# Altium PCB SuperGameBro_RevA1.PcbDoc (part 2 of 2)
Units mil, origin at the board's own origin, x right, y up, seen from the top; angles counter-clockwise.
Board outline 6943 x 4294 mil, 4 copper layers (Top Layer, GND, 3V3P, Bottom Layer), stack 33.234 mil thick; 150 components, 156 nets, 716 pads, 351 vias.
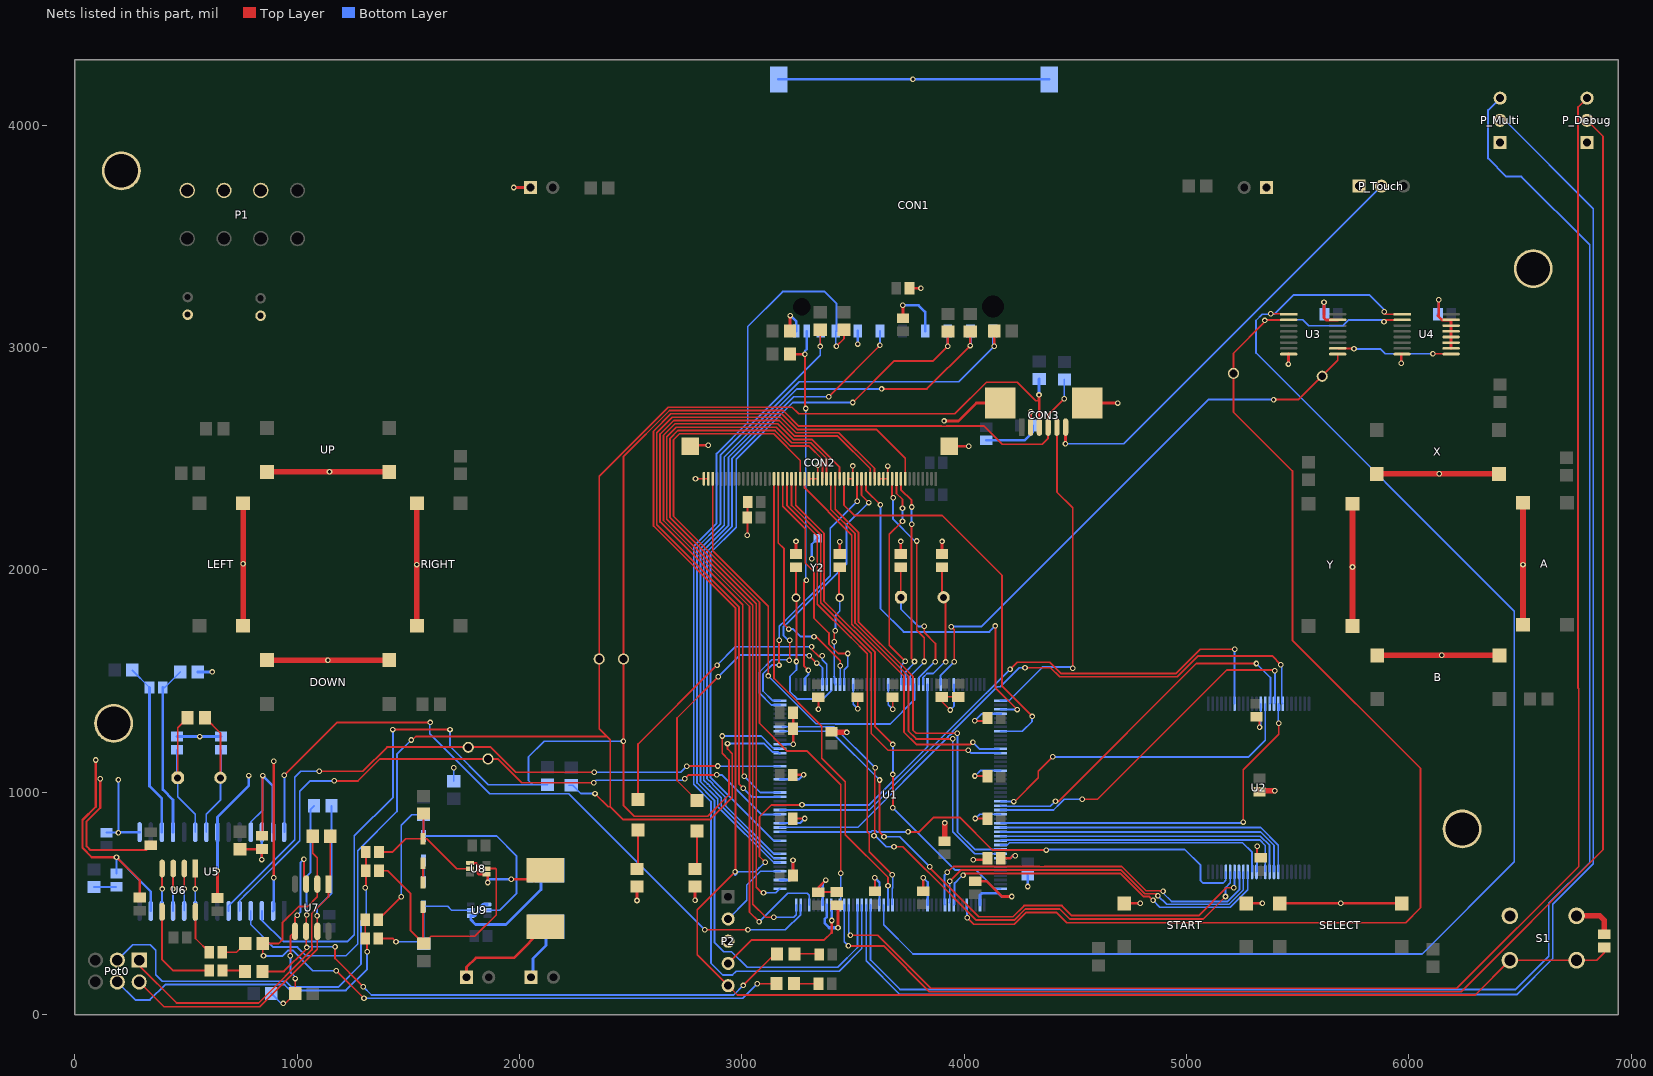
[diagram p4: the nets of this part, all layers, seen from the top]

## Via types
v1: diameter 25, hole 15, Top Layer to Bottom Layer, 351 vias

## Nets (pads, with @x,y where several pads share a name; then routed paths per layer and width w, separated by ;. In a path a pad name is that pad's centre, name@x,y a point inside that pad or via, vN(x,y) a via of type N, cw(c..) or ccw(c..) an arc to the next point about the centre after c; other vN are vias at no path point) (continued)
FMC_D4: U1.68 U2.14 | length 1484.4
  Top Layer w8: v1(4223,958) 4227,958 4334,1065 4334,1094 v1(4399,1159)
  Bottom Layer w8: U1.68@4165.7,958 v1(4223,958) ; v1(4399,1159) 5280,1159 5354.53,1233.53 U2.14@5354.53,1397.95
FMC_D5: U1.69 U2.15 | length 1624.4
  Top Layer w8: v1(4411.41,959.41) 4425.41,959.41 5045,1579 v1(5315,1579)
  Bottom Layer w8: U1.69@4164.29,939.73 4167.52,936.5 4388.5,936.5 v1(4411.41,959.41) ; v1(5315,1579) 5378,1516 5378,1401.74 U2.15@5376,1399.74
FMC_D6: U1.70 U2.16 | length 1644.7
  Top Layer w8: v1(4531,968) 4600,968 5182,1550 5394,1550 v1(5398,1546)
  Bottom Layer w8: U1.70@4164.29,920.04 4402.45,920.04 4432.91,950.5 4432.91,950.91 4450,968 v1(4531,968) ; U2.16@5395,1399.06 5398,1402.06 v1(5398,1546)
FMC_D7: U1.73 U2.17 | length 1720.7
  Top Layer w8: v1(5256,866) 5256,1101 5415,1260 v1(5415,1310)
  Bottom Layer w8: U1.73@4165.3,862 5252,862 v1(5256,866) ; v1(5415,1310) 5413.58,1311.42 U2.17@5413.58,1397.95 5418.36,1393.17 U2.17@5418.36,1370
FMC_D8: U1.74 U2.32 | length 1401.8
  Bottom Layer w8: U1.74@4164.29,841.3 5333.7,841.3 5413.58,761.42 U2.32@5413.58,642.05
FMC_D9: U1.75 U2.33 | length 1373.7
  Bottom Layer w8: U1.75@4164.29,821.62 5333.38,821.62 5393.9,761.1 U2.33@5393.9,642.05
FMC_D10: U1.76 U2.34 | length 1345.7
  Bottom Layer w8: U1.76@4164.29,801.93 5333.07,801.93 5374.21,760.79 U2.34@5374.21,642.05
FMC_D11: U1.77 U2.35 | length 1320.4
  Bottom Layer w8: U1.77@4164.29,782.24 4167.54,785.5 5329.5,785.5 5354.53,760.47 U2.35@5354.53,642.05
FMC_D12: U1.78 U2.38 | length 1240.6
  Bottom Layer w8: U1.78@4164.29,762.56 4194.56,762.56 4204.5,772.5 5252.5,772.5 5295.47,729.53 U2.38@5295.47,642.05
FMC_D13: U1.96 U2.39 | length 1613.3
  Top Layer w8: v1(3995.5,626.5) 4004,635 4703.23,635 4807.73,530.5 4833.5,530.5 v1(4850,514)
  Bottom Layer w8: U1.96@3953.66,492.88 3957.5,496.71 3957.5,591.5 3987,621 3988,620 3994.5,626.5 v1(3995.5,626.5) ; v1(4850,514) 4881,483 5197.17,483 5275.79,561.61 U2.39@5275.79,642.05
FMC_D14: U1.97 U2.40 | length 1611.3
  Top Layer w8: v1(3936,600) 3986,650 4706.62,650 4813.12,543.5 4863.5,543.5 v1(4872,535)
  Bottom Layer w8: U1.97@3934,502.46 3936,504.46 v1(3936,600) ; v1(4872,535) 4911,496 5191.79,496 5256.1,560.31 U2.40@5256.1,642.05
FMC_D15: U1.98 U2.41 | length 1651.3
  Top Layer w8: v1(3925,640) 3951,666 4340.59,666 4342.09,664.5 4359.91,664.5 4361.41,666 4709,666 4818.5,556.5 4880.91,556.5 4882.41,555 v1(4895,555)
  Bottom Layer w8: U1.98@3915,493.59 3912.5,496.09 3912.5,627.5 v1(3925,640) ; v1(4895,555) 4895,547 4933,509 5186.41,509 5238.5,561.09 5238.5,639.96 U2.41@5236.42,642.05
FMC_NBL0: U1.169 U2.42 | length 2691.4
  Top Layer w8: v1(3620,1055) 3620,820 v1(3640,800) ; v1(3845,665) 3845,660.59 4065.59,440 4220,440 4270,490 4440,490 4485,445 5055,445 5180,570 v1(5213,570)
  Bottom Layer w8: U1.169@3172.17,1274.37 3400.63,1274.37 v1(3620,1055) ; v1(3640,800) 3710,800 v1(3845,665) ; v1(5213,570) 5216.73,573.73 U2.42@5216.73,642.05
FMC_NBL1: U1.170 U2.43 | length 2760.5
  Top Layer w8: v1(3595,805) 3597,805 3602,800 3598.5,796.5 3598.5,1108.5 v1(3600,1110) ; v1(3685,755) 3725,755 3823.5,656.5 3823.5,656.09 3836.09,643.5 3836.5,643.5 4055,425 4225,425 4275,475 4430,475 4475,430 5075,430 v1(5176,531)
  Bottom Layer w8: U1.170@3183.83,1295 3415,1295 v1(3600,1110) ; v1(3595,805) 3600,805 3650,755 v1(3685,755) ; v1(5176,531) 5176,571 5197.05,592.05 U2.43@5197.05,642.05
GND: A.0 B.0 C1.1 C2.1 C3.1 C4.1 C5.1 C6.1 C7.1 C8.1 C9.1 C10.1 C11.1 C12.1 C13.2 C14.2 C15.2 C16.1 C17.1 C18.1 C19.1 C20.1 C21.1 C22.1 C23.1 C24.1 C25.1 C26.1 C27.1 C28.1 C29.1 C30.1 C31.1 C32.1 C33.2 C34.1 C35.1 C36.1 C38.1 C39.1 C41.1 C42.1 C58.1 C62.1 C63.1 C64.1 C65.1 C80.1 CON1.3 CON1.6 CON2.0 CON2.A12 CON2.A13 CON2.A14 CON2.A20 CON2.A21 CON2.A28 CON2.A29 CON2.A30 CON2.A53 CON2.A54 CON3.0 CON3.2 CP1.1 CP2.1 DOWN.0 LEFT.0 LEFT_SHOULDER.1 P1.2 P1.4 P1.6 P2.3 P_Debug.1 P_Multi.1 P_Touch.1 pad.0@210,3795 pad.1@6240,835 pad.2@6560,3355 pad.3@175,1310 R28.2 R_A0.2 R_LED0.2 R_LED1.2 RIGHT.0 RIGHT_SHOULDER.1 S1.1 SELECT.0 START.0 U1.14 U1.22 U1.37 U1.48 U1.61 U1.71 U1.90 U1.102 U1.113 U1.126 U1.135 U1.148 U1.158 U1.166 U2.13 U2.37 U3.8 U3.15 U4.8 U4.10 U4.11 U4.12 U4.13 U4.14 U4.15 U5.2 U5.13 U5.15 U5.22 U5.25 U5.27 UP.0 X.0 Y2.3 Y.0 | length 17760.3
  Top Layer w8: C33.2@842,803.53 845,806.53 v1(845,1075) ; v1(2792,2410) CON2.A54@2830,2410 CON2.A53@2849.69,2410 ; v1(3025.47,2155.53) C62.1@3025.47,2236 ; C62.1@3026.47,2223 C63.1@3026.47,2291 ; CON2.A30@3302.44,2410 CON2.A29@3322.13,2410 CON2.A28@3341.81,2410 v1(3341.81,2469.81) ; v1(3345,1373) C13.2@3345,1428.47 ; CON2.A21@3479.61,2410 CON2.A20@3499.29,2410 v1(3499.29,2467.71) ; v1(3522,1376) C24.1@3522,1427.47 ; CON2.A14@3617.4,2410 CON2.A13@3637.09,2410 CON2.A12@3656.77,2410 v1(3656.77,2467.23) ; v1(3679,1373) C23.1@3679,1427.47 ; v1(3938,1370) 3901,1407 3901,1429.47 C21.1@3975,1429.47 ; v1(4048,1321) 4092.47,1321 C20.1@4105.47,1334 ; v1(4049,1073) C19.1@4106.47,1073 ; v1(4051,882) C18.1@4106.47,882 ; C29.1@5315,1339.47 5329,1325.47 v1(5329,1292) ; v1(5318,757) 5318,727.21 5315.16,724.37 C58.1@5335,704.53
  Top Layer w10: v1(95,1145) 95,935 35,875 35,750 77,708 v1(188,708) 292,604 C35.1@292,526.53 ; v1(115,1060) 115,930.46 53.5,868.96 53.5,756.85 70.35,740 320.53,740 C36.1@342,761.47 ; C7.1@3230.53,882 v1(3283,882) ; C6.1@3230.53,1079 v1(3278,1079) ; v1(3231.53,1215.53) C5.1@3231.53,1358 ; v1(3378,605) 3345,572 3345,551.53 C15.2@3427,551.53 ; C10.1@3599,556.53 v1(3599,615) ; C11.1@3816,556.53 v1(3816,616)
  Top Layer w12: C38.1@642,524.53 v1(642,646) ; v1(895,616) v1(895,1140) ; v1(1974,3720) LEFT_SHOULDER.1@2050,3720 ; v1(2529,513) R_LED1.2@2529,575.63 ; CON2.0@2768.98,2555.67 2773.31,2560 v1(2850,2560) ; v1(2790,514) R_LED0.2@2790,575.63 ; C8.1@3230.53,625 v1(3230.53,694.53) ; C3.1@3244,2071.53 v1(3244,2128) ; C4.1@3441,2071.53 v1(3441,2126) ; C1.1@3715,2071.53 v1(3715,2128) ; C27.1@3725,3132.53 v1(3725,3190) ; C28.1@3754.53,3267 v1(3806,3267) ; C2.1@3901,2071.53 v1(3901,2128) ; v1(3910,2670) 3975,2670 4055.55,2750.55 CON3.0@4163.54,2750.55 ; CON2.0@3934.33,2555.67 v1(4020.67,2555.67) ; v1(4042,696) 4098.47,696 C14.2@4105.47,703 ; C12.1@4050,599.53 4102.47,599.53 4171,531 v1(4215,531) ; C20.1@4104.88,1334.59 C20.1@4104.88,1339.12 ; CON3.2@4299.37,2642.28 v1(4299.37,2711.63) ; CON3.0@4553.31,2750.55 v1(4690.55,2750.55) ; START.0@4720,500 v1(4793,500) ; START.0@5253.21,484 START.0@5269.21,500 v1(5342,500) ; SELECT.0@5420,500 v1(5695,500) SELECT.0@5969.21,500 ; v1(5459,2926) 5459,2969.86 U3.8@5460,2970.87 ; v1(5619,3204) 5619,3134 5628.59,3124.41 U3.15@5680.47,3124.41 ; v1(5967,2929) 5967,2967.86 U4.8@5970,2970.87 ; v1(6135,3215) 6135,3146 6131.47,3142.47 6149.54,3124.41 U4.15@6190.47,3124.41 U4.14@6190.47,3098.82 U4.13@6190.47,3073.23 U4.12@6190.47,3047.64 U4.11@6190.47,3022.05 U4.10@6190.47,2996.46
  Top Layer w25: LEFT.0@757,1749.79 v1(757,2027) LEFT.0@757,2299 ; DOWN.0@864.79,1594 v1(1139,1594) DOWN.0@1414,1594 ; UP.0@864.79,2441 v1(1146,2441) UP.0@1414,2441 ; RIGHT.0@1539,1749.79 v1(1539,2024) RIGHT.0@1539,2299 ; C16.1@3405,1273.53 3409.53,1269 v1(3473,1269) ; C17.1@3913,780.53 v1(3913,862) ; C30.1@5329,1002.47 5331,1000.47 5336.53,1006 v1(5397,1006) ; Y.0@5747,1747.79 v1(5747,2013) Y.0@5747,2297 ; X.0@5856.79,2432 v1(6138,2432) X.0@6406,2432 ; B.0@5859,1616 v1(6149,1616) B.0@6408.21,1616 ; A.0@6514,1753 v1(6514,2024) A.0@6514,2302.21 ; S1.1@6754.75,444.13 6859.39,444.13 6880,423.53 C26.1@6880,360.53
  Bottom Layer w8: 792,866 845,919 v1(845,1075) ; R_A0.2@1705,1049.37 v1(1705,1110) ; U1.14@3501.91,1486 3501.91,1396.09 v1(3522,1376) ; U1.22@3659.38,1486 3659.38,1392.62 v1(3679,1373) ; v1(3938,1370) 3954.66,1386.66 U1.37@3954.66,1486 ; v1(4048,1321) 4080.11,1353.11 4125.89,1353.11 ; v1(4049,1073) 4074.2,1098.2 U1.61@4165.29,1098.2 ; v1(4051,882) 4070.35,901.35 U1.71@4165.29,901.35 ; U2.37@5315.16,642.05 5318,644.89 v1(5318,757) ; v1(5329,1292) 5334.84,1297.84 U2.13@5334.84,1397.95
  Bottom Layer w10: C41.1@143,818.53 v1(196.53,818.53) v1(196.53,1056.53) ; C42.1@188,634.53 v1(188,708) 342,554 U5.13@342,466 ; v1@198.33,820.33 U5.15@292,820.33 ; U1.148@3173.17,861.99 3262.99,861.99 v1(3283,882) ; U1.158@3173.17,1058.84 3257.84,1058.84 v1(3278,1079) ; U1.166@3173.95,1215.53 v1(3231.53,1215.53) ; v1(3315,2050) 3315,2115.14 Y2.3@3342.57,2142.72 ; U1.126@3364.11,493.88 3364.11,588.89 3378,602.78 v1(3378,605) ; v1(3599,615) 3620.02,593.98 U1.113@3620.02,493.88 ; v1(3816,616) 3836.55,595.45 U1.102@3836.55,493.88
  Bottom Layer w12: C34.1@460,1250.53 v1(562.53,1250.53) C39.1@658,1250.53 ; R28.2@553.37,1541 v1(618,1541) ; v1(642,646) U5.22@642,820.33 642,889 783,1030 v1(783,1075) ; v1(845,1075) 892,1028 U5.27@892,820.33 ; U5.2@892,466 895,469 v1(895,616) ; CON1.3@3165.48,4206.16 v1(3770.16,4206.16) CON1.6@4383.59,4206.16 ; U1.135@3172.17,605.08 3217.08,605.08 3230,618 3230,694 v1(3230.53,694.53) ; v1(3522.17,3015.83) CON1.6@3522.17,3074.27 ; v1(3725,3190) 3795,3190 3824.93,3160.07 CON1.3@3824.93,3074.27 ; U1.90@4071.77,492.88 4071.77,536.77 4080,545 4155,545 4169,531 v1(4215,531) ; C65.1@4100,2582.47 4271.47,2582.47 4309.53,2620.53 C64.1@4309.53,2649 ; 4125.89,1353.11 U1.48@4164.29,1353.11 ; v1(4286,576) C80.1@4286,625.47 ; C64.1@4299.37,2659.16 v1(4299.37,2711.63) ; C31.1@5619,3152.47 v1(5619,3204) ; C32.1@6131.47,3150 6135,3153.53 v1(6135,3215)
I2C1_SCL: CON3.3 pad.0@2359,1599 R20.2 R23.1 U1.164 U5.4 | length 7807.9
  Top Layer w8: v1(1513,1235) 1518,1235 1533.5,1250.5 2394.5,1250.5 ; v1(2340,994) 2399,935 2409,935 ; v1(2936,1219) 2936,1195 2957.5,1173.5 2957.5,977.5 2857,877 2467,877 2409,935 ; 4338,2761 4323,2761 4240,2844 4101,2844 3959,2702 3256,2702 3226,2732 2669,2732 2359,2422 2359,1286 2409,1236 2409,935
  Top Layer w12: 4337,2762 v1(4337,2787) ; CON3.3@4338,2643.02 4338,2761
  Bottom Layer w8: U5.4@792,466 792,405 893.5,303.5 1001.5,303.5 1040,265 1220,265 1272.5,317.5 1272.5,737.07 1449,913.57 1449,1171 v1(1513,1235) ; R23.1@2223.37,1031.63 R23.1@2233,1031.63 2239.58,1031.63 2277.21,994 v1(2340,994) ; v1(2936,1219) 3100.63,1219 3138.91,1180.73 3163.5,1180.73 3170.22,1174 U1.164@3172.17,1175.94
  Bottom Layer w12: v1(4337,2787) 4337,2857.63 R20.2@4338,2858.63
I2C1_SDA: CON3.4 pad.1@2468,1599 R21.2 R24.1 U1.165 U5.3 | length 7964.8
  Top Layer w8: v1(1431,1282) v1(1688,1282) ; v1(2912,1253) 2912.5,1252.5 2912.5,1175.11 2942.5,1145.11 2942.5,987.5 2847,892 2517.21,892 2468,941.21 2468,2509.79 2675.21,2717 3186.69,2717 3256.69,2647 3899.77,2647 3900.27,2646.5 3919.73,2646.5 3920.23,2647 4090,2647 4172,2565 4351,2565 4378.11,2592.11 CON3.4@4378.11,2642.28 4378.11,2697.11 v1(4451,2770)
  Bottom Layer w8: U5.3@842,466 842,425 938,329 1228,329 1257.5,358.5 1257.5,803.5 1432,978 1431,979 v1(1431,1282) ; v1(1688,1282) 1688,1206 1860.37,1033.63 2060.37,1033.63 ; R24.1@2127,1033.63 2060.37,1033.63 ; v1(2468,1229) 2111,1229 2041,1159 2041,1053 2060.37,1033.63 ; v1(2912,1253) 3087.85,1253 3133.64,1207.21 3133.64,1205.68 3138.91,1200.41 3167.39,1200.41 U1.165@3169.39,1198.41 ; v1(4451,2770) R21.2@4451,2856.63
INPUT_LATCH: U1.112 U3.1 U4.1 | length 6899.7
  Top Layer w8: v1(5380,3152) 5458,3152 U3.1@5460,3150 ; v1(5890,3161) 5890,3152 5892,3150 U4.1@5970,3150
  Bottom Layer w8: U1.112@3638.7,492.88 3638.7,404 3770.2,272.5 6060.5,272.5 6475,687 6475,1814 5313,2976 5313,3122 5341,3150 5395.87,3150 5482.86,3237 5823,3237 5890,3170 v1(5890,3161)
LCD_SPI_NEN: CON2.A9 U1.26 | length 967.3
  Top Layer w8: CON2.A9@3715.83,2410 3715.83,2361.17 3764,2313 v1(3764,2283) ; v1(3764,2205) 3763.5,2204.5 3763.5,1601.5 v1(3777,1588)
  Bottom Layer w8: U1.26@3737.13,1485 3737.13,1542.13 3777,1582 v1(3777,1588) ; v1(3764,2205) v1(3764,2283)
LCKT: U5.11 U6.3 | length 191.4
  Top Layer w8: v1@442,556 442,656 U6.3@443,657
  Bottom Layer w8: U5.11@442,466 v1@442,556
  other v1: 442,565
LTDC_B3: CON2.A15 U1.154 | length 3092.2
  Top Layer w8: v1(3007,1018) 2987.5,1037.5 2987.5,1834.5 2618,2204 2618,2617.36 2687.64,2687 3174.27,2687 3244.27,2617 3437,2617 3597.72,2456.28 CON2.A15@3597.72,2410
  Bottom Layer w8: v1(3007,1018) 3045.91,979.09 U1.154@3172.17,979.09
LTDC_B4: CON2.A16 U1.155 | length 2992.9
  Top Layer w8: v1(3011,1072) 3005,1078 3005,1844 2633,2216 2633,2611.15 2693.85,2672 3168.05,2672 3238.05,2602 3432,2602 3578.03,2455.97 CON2.A16@3578.03,2410
  Bottom Layer w8: v1(3011,1072) 3084.22,998.78 U1.155@3172.17,998.78
LTDC_B5: CON2.A17 U1.47 | length 1675.1
  Top Layer w8: CON2.A17@3558.35,2410 3558.35,2358.65 v1(3624,2293) ; v1(4141,1748) 4141,1470 v1(4239,1372)
  Bottom Layer w8: v1(3624,2293) 3624,1825 3728,1721 4114,1721 v1(4141,1748) ; U1.47@4164.29,1372.79 4165.08,1372 v1(4239,1372)
LTDC_B6: CON2.A18 U1.175 | length 1371.4
  Top Layer w8: v1(3214,1594) 3216,1596 v1(3216,1683) ; CON2.A18@3538.66,2410 3538.66,2335.34 v1(3571,2303)
  Bottom Layer w8: U1.175@3172.17,1392.48 3133.52,1392.48 3080.5,1445.5 3080.5,1538.95 3082,1540.45 3082,1543 3134.5,1595.5 3212.5,1595.5 v1(3214,1594) ; v1(3216,1683) 3210,1683 3187.5,1705.5 3187.5,1743.73 3201.27,1757.5 3202.71,1757.5 3471,2025.79 3471,2203 v1(3571,2303)
LTDC_B7: CON2.A19 U1.176 | length 1244.8
  Top Layer w8: v1(3168,1572) 3168,1683 v1(3169,1684) ; v1(3518.98,2309.02) CON2.A19@3518.98,2410
  Bottom Layer w8: v1(3168,1572) 3134.77,1572 3095.5,1532.73 3095.5,1455.5 3138.83,1412.17 U1.176@3172.17,1412.17 ; v1(3169,1684) 3169,1746.45 3195.05,1772.5 3196.5,1772.5 3398,1974 3398,2188.05 v1(3518.98,2309.02)
LTDC_CLK: CON2.A38 U1.111 | length 2129.2
  Top Layer w8: CON2.A38@3144.96,2410 3144.96,1512.04 3360,1297 3360,1153.38 3466,1047.38 3466,809.59 3658,617.59 v1(3658,579)
  Bottom Layer w8: U1.111@3658,493.26 v1(3658,579)
LTDC_DE: CON2.A52 U1.28 | length 1851.8
  Top Layer w8: CON2.A52@2869.37,2410 2869.37,2086.84 3119,1837.21 v1(3119,1523)
  Bottom Layer w8: v1(3119,1523) 3334,1308 3420.38,1308 3421.38,1307 3668,1307 3776.49,1415.49 U1.28@3776.49,1485
LTDC_G2: CON2.A22 U1.52 | length 1833.6
  Top Layer w8: CON2.A22@3459.92,2410 3459.92,2291.08 3506,2245 3901,2245 4171,1975 4171,1476 v1(4306,1341)
  Bottom Layer w8: U1.52@4164.29,1274.37 4262.37,1274.37 4306,1318 v1(4306,1341)
LTDC_G3: CON2.A23 U1.129 | length 3639.2
  Top Layer w8: v1(3078,417) 3035,460 3035,1835.21 2648,2222.21 2648,2604.93 2700.07,2657 3161.84,2657 3231.84,2587 3315,2587 3440.24,2461.76 CON2.A23@3440.24,2410
  Bottom Layer w8: v1(3078,417) 3207,546 3294,546 3304.05,535.95 U1.129@3304.05,492.88
LTDC_G4: CON2.A24 U1.79 | length 2152.2
  Top Layer w8: CON2.A24@3420.55,2410 3420.55,2273.45 3525,2169 3525,1766.77 3726.27,1565.5 3726.5,1565.5 3770,1522 3770,1280 3785,1265 v1(3970,1265)
  Bottom Layer w8: v1(3970,1265) 3970.5,1264.5 3970.5,1231.09 3970,1230.59 3970,821 4048.12,742.88 U1.79@4164.29,742.88
LTDC_G5: CON2.A25 U1.80 | length 2167.7
  Top Layer w8: CON2.A25@3400.87,2410 3400.87,2271.92 3510,2162.79 3510,1761 3750,1521 3750,1274.38 3784.38,1240 v1(3949,1240)
  Bottom Layer w8: v1(3949,1240) 3949,822 4047.81,723.19 U1.80@4164.29,723.19
LTDC_G6: CON2.A26 U1.132 | length 3416.2
  Top Layer w8: v1(3144,438) 3109,438 3050,497 3050,1841.43 2663,2228.43 2663,2598.72 2706.28,2642 3155.63,2642 3225.63,2572 3311,2572 3381.18,2501.82 CON2.A26@3381.18,2410
  Bottom Layer w8: v1(3144,438) 3234.62,438 3245,448.38 U1.132@3245,492.88
LTDC_G7: CON2.A27 U1.133 | length 3145.5
  Top Layer w8: v1(3098,548) 3090,548 3065,573 3065,1847.64 2678,2234.64 2678,2592.51 2712.49,2627 3149.41,2627 3219.41,2557 3303,2557 3363.31,2496.69 3363.31,2411.82 CON2.A27@3361.5,2410
  Bottom Layer w8: v1(3098,548) 3153.88,548 U1.133@3171.88,566
LTDC_HSYNC: CON2.A36 U1.12 | length 1077.4
  Top Layer w8: CON2.A36@3184.33,2410 3184.33,2287.03 3286,2185.36 3286,2031 3325,1992 3325,1783.23 3392,1716.23 3392,1666.77 3434.77,1624 v1(3477,1624)
  Bottom Layer w8: U1.12@3461.53,1485 3461.53,1551.53 3477,1567 v1(3477,1624)
LTDC_R3: CON2.A31 U1.56 | length 1793.7
  Top Layer w8: CON2.A31@3282.76,2410 3282.76,2368.82 3495,2156.57 3495,1754.79 3508.79,1741 3510.21,1741 3730,1521.21 3730,1270 3785,1215 4030,1215 v1(4040,1225)
  Bottom Layer w8: v1(4040,1225) 4071,1194 U1.56@4157.88,1194
LTDC_R4: CON2.A32 U1.122 | length 3170.1
  Top Layer w8: CON2.A32@3263.07,2410 3263.07,2492.13 3143.2,2612 2720,2612 2693,2585 2693,2242 3080,1855 3080,1310 3205,1185 3294,1185 3445,1034 v1(3445,635)
  Bottom Layer w8: U1.122@3441.85,492.88 3445,496.03 v1(3445,635)
LTDC_R5: CON2.A33 U1.88 | length 2298.9
  Top Layer w8: CON2.A33@3243.39,2410 3243.39,2291.61 3370,2165 3370,1858.57 3502.57,1726 3504,1726 3600,1630 3600,1295 v1(3680,1215) ; v1(3680,930) v1(3680,1080)
  Bottom Layer w8: v1(3680,930) 3960,650 4055,650 4125.76,579.24 4125.76,575.76 4135.81,565.71 U1.88@4164.29,565.71 ; v1(3680,1080) v1(3680,1215)
LTDC_R6: CON2.A34 U1.57 | length 1913.4
  Top Layer w8: CON2.A34@3223.7,2410 3223.7,2290.09 3355,2158.79 3355,1852.36 3496.36,1711 3497.79,1711 3583,1625.79 3583,1264 3658,1189 v1(4019,1189)
  Bottom Layer w8: v1(4019,1189) 4032.06,1175.94 U1.57@4164.29,1175.94
LTDC_R7: CON2.A35 U1.110 | length 2114.9
  Top Layer w8: CON2.A35@3204.02,2410 3204.02,2288.56 3340,2152.57 3340,1846.15 3490.15,1696 3491.57,1696 3565,1622.57 3565,822.41 3573.5,813.91 3573.5,732.5 v1(3677,629)
  Bottom Layer w8: U1.110@3677,493.95 3677,567.59 3679.5,570.09 3679.5,626.5 v1(3677,629)
LTDC_VSYNC: CON2.A37 U1.11 | length 1093.7
  Top Layer w8: CON2.A37@3164.65,2410 3164.65,2121 3190.5,2095.15 3190.5,1810.27 3190,1809.77 3190,1755 v1(3211,1734) ; v1(3325,1700) 3335,1700 3443,1592 v1(3443,1569)
  Bottom Layer w8: v1(3211,1734) 3231,1734 3265,1700 v1(3325,1700) ; U1.11@3442,1485.15 3443,1486.15 v1(3443,1569)
MCLK: U5.12 U6.4 | length 191.4
  Top Layer w8: v1(393,565) U6.4@393,657
  Bottom Layer w8: U5.12@392,466 392,564 v1(393,565)
MP3_DR: U1.131 U5.28 | length 3165.7
  Top Layer w8: v1(943,1076) 1181,1314 v1(1599,1314) ; v1(2833,382) v1(3028,382)
  Bottom Layer w8: U5.28@943,821.33 v1(943,1076) ; v1(1599,1314) 1596.5,1311.5 1596.5,1263.5 1866.93,993.07 2221.93,993.07 v1(2833,382) ; v1(3028,382) 3028.5,381.5 3196.5,381.5 3264.68,449.68 U1.131@3264.68,492.88
NetC33_1: C33.1 R22.1 U5.26 | length 267
  Top Layer w10: R22.1@743,743.63 841.16,743.63 v1(841.16,697.16)
  Bottom Layer w10: v1(841.16,697.16) U5.26@841.16,819.49
NetC42_2: C42.2 R27.2 | length 99.2
  Bottom Layer w8: R27.2@87,573.63 C42.2@186.16,573.63
NetC45_1: C45.1 C50.1 Pot0.2 | length 1826.8
  Top Layer w8: v1@1309.47,570 C50.1@1309.47,647 C45.1@1309.47,731
  Bottom Layer w8: Pot0.2@191.57,245 260.57,314 340,314 364,290 364,180 394,150 949.55,150 976.05,123.5 1184.5,123.5 1287.5,226.5 1287.5,420.79 1311,444.29 1311,565 v1(1306,570)
NetC46_2: C46.2 R31.1 | length 119.3
  Top Layer w8: C46.2@663.53,280.59 727.63,280.59 R31.1@766.63,319.59
NetC48_1: C48.1 U8.1 U8.4 | length 450.8
  Top Layer w12: U8.1@1778,682 1780,680 1805,680 1814,671 1814,635 1818.18,630.82 U8.4@1852.8,630.82 1857,626.62 v1(1857,594) ; v1(1963,608) 2057.23,608 2066.23,599 C48.1@2116,648.77
  Bottom Layer w12: v1(1857,594) 1854,597 1865,608 v1(1963,608)
NetC48_2: C48.2 LS1.1 | length 474.5
  Top Layer w12: LS1.1@1762,168 1762,213 1804,255 1975.77,255 C48.2@2116,395.23
NetC49_2: C49.2 R32.1 | length 110.1
  Top Layer w8: R32.1@3235.37,139 C49.2@3345.47,139
NetC51_1: C51.1 U9.1 U9.4 | length 609.1
  Bottom Layer w12: U9.1@1856,495 1834,495 1819,480 1819,463 1801,445 1782.38,445 U9.4@1781.2,443.82 1781.2,426.8 1803,405 1940,405 2097,562 2097,625.77 C51.1@2120,648.77
NetC51_2: C51.2 LS2.1 | length 255
  Bottom Layer w12: LS2.1@2053,168 2061,176 2061,252 2120,311 C51.2@2120,395.23
NetC52_1: C52.1 C56.1 Pot0.5 | length 1461.4
  Top Layer w8: C52.1@1306.47,426 1307,425.47 1307,354 1315,346 v1(1315,283)
  Bottom Layer w8: Pot0.5@191.57,146.57 272.15,66 338,66 407,135 943.34,135 969.84,108.5 1219.5,108.5 1315,204 v1(1315,283)
NetC53_2: C53.2 R38.1 | length 103
  Top Layer w8: C53.2@664.53,198.59 761.04,198.59 R38.1@765.63,194
NetC55_2: C55.2 R39.1 | length 111.1
  Top Layer w8: R39.1@3238.37,273.31 C55.2@3349.47,273.31
NetCON1_11: CON1.11 R7.2 | length 151.3
  Top Layer w12: R7.2@3217.37,3074 3217.37,3142.37 v1(3219,3144)
  Bottom Layer w12: v1(3219,3144) 3245.4,3117.6 CON1.11@3245.4,3074.27
NetD1_K: D1.K D2.A | length 86.8
  Top Layer w8: D2.A@1566,594.12 D1.K@1566,680.88
NetD3_K: D3.K D4.A | length 95.8
  Bottom Layer w8: D4.A@1569,597.12 D3.K@1569,692.88
NetLED0_K: LED0.K R_LED0.1 | length 161.7
  Top Layer w8: R_LED0.1@2799,663.37 LED0.K@2799,825.1
NetLED1_K: LED1.K R_LED1.1 | length 170.7
  Top Layer w8: R_LED1.1@2534,659.37 LED1.K@2534,830.1
NetPot0_1: Pot0.1 R30.2 U7.1 | length 1516.4
  Top Layer w8: Pot0.1@290,245 290,220 458,52 827.55,52 1066.5,290.95 1066.5,291.27 1067.5,292.27 1067.5,311.73 1066.5,312.73 1066.5,454.73 1080.27,468.5 1080.5,468.5 1141,529 U7.1@1141,587 1149.37,595.37 R30.2@1149.37,802
NetPot0_6: Pot0.6 R37.2 U7.7 | length 1626.9
  Top Layer w8: Pot0.6@290,146.57 401.57,35 831.77,35 1091,294.23 U7.7@1091,374.4 1091,444 v1(1090,445)
  Bottom Layer w8: v1(1090,445) 1090,480 1155.37,545.37 R37.2@1155.37,939
NetR30_1: R30.1 R31.2 R32.2 U7.2 | length 3149.4
  Top Layer w8: v1(849,264) 845.37,267.63 R31.2@845.37,319.59 917.59,319.59 934,336 934,412.23 1007.77,486 1047,486 1091,530 U7.2@1091,587 1091,705 1070.63,725.37 R30.1@1070.63,802 ; v1(1177,197) v1(1301,73) ; v1(3070,139) R32.2@3156.63,139
  Bottom Layer w8: v1(849,264) 935.77,264 960.27,288.5 979.73,288.5 1071.23,197 v1(1177,197) ; v1(1301,73) 3004,73 v1(3070,139)
NetR34_2: R34.2 R35.2 U7.3 U7.5 | length 901.2
  Top Layer w8: v1(938,50) 946.63,50 R34.2@991.63,95 991,95.63 992,96.63 v1(992,162) ; v1(970,265) 970,353.4 U7.5@991,374.4 991,436 v1(1001,446) ; v1(1031,699) 1031,597 U7.3@1041,587
  Bottom Layer w8: R35.2@883.37,94 884.37,95 929.37,50 v1(938,50) ; v1(970,265) 970,191 992,169 v1(992,162) ; v1(1001,446) 1015,460 1015,683 v1(1031,699)
NetR37_1: R37.1 R38.2 R39.2 U7.6 | length 3213
  Top Layer w8: R38.2@844.37,194 941,194 1041,294 U7.6@1041,374.4 1041,446 v1(1043,448) ; v1(1171,305) 1171,252 v1(1298,125) ; v1(3007,131) 3148.31,272.31 R39.2@3158.63,272.31
  Bottom Layer w8: v1(1043,448) 1043,621.79 1061,639.79 1061,923.37 R37.1@1076.63,939 ; v1@1044,297 1052,305 v1(1171,305) ; v1(1298,125) 1335,88 2964,88 v1(3007,131)
  other v1: 1044,302
NWAKE_TOUCH: CON3.6 P_Touch.2 | length 1976.7
  Top Layer w12: v1(4456,2567) 4456,2641.43 CON3.6@4456.85,2642.28
  Bottom Layer w8: v1(4456,2567) 4718,2567 P_Touch.2@5877,3726
OSC_MAIN_IN: C1.2 U1.29 Y1.1 | length 639.3
  Top Layer w8: Y1.1@3715,1877.94 C1.2@3715,2012.47 ; v1(3821,1746) 3821,1719 3871,1669 v1(3871,1587)
  Bottom Layer w8: Y1.1@3715.94,1877 3715.94,1824.06 3794,1746 v1(3821,1746) ; U1.29@3796.18,1485 3796.18,1515.18 3868,1587 v1(3871,1587)
OSC_MAIN_OUT: C2.2 U1.30 Y1.2 | length 597.1
  Top Layer w8: Y1.2@3901,1884.06 C2.2@3901,2012.47 ; Y1.2@3908.06,1877 3916,1869.06 3916,1595.87 3907.13,1587 3908.13,1586 v1(3917,1586)
  Bottom Layer w8: U1.30@3815.87,1485 3815.87,1516.48 3833.38,1534 3861,1534 3913,1586 v1(3917,1586)
OSC_RTC_IN: C3.2 U1.9 Y2.1 | length 784.2
  Top Layer w8: Y2.1@3244,1877.94 C3.2@3244,2012.47 ; Y2.1@3244.15,1875 3246,1873.15 v1(3246,1588)
  Bottom Layer w8: v1(3246,1588) 3246,1550 3217,1521 3217,1452 3249,1420 3365.95,1420 U1.9@3402.48,1456.52
OSC_RTC_OUT: C4.2 U1.10 Y2.2 | length 541.8
  Top Layer w8: v1@3415,1671.33 v1@3415,1677 ; v1(3416,1677) 3416,1719 3415,1720 v1(3421,1726) ; Y2.2@3437.06,1877 C4.2@3437.06,2008.54
  Bottom Layer w8: v1(3416,1677) 3416,1521.64 3415,1520.64 3417.39,1518.26 3417.39,1489.78 U1.10@3422.17,1485 ; v1(3421,1726) 3422,1727 3422,1796 3441,1815 Y2.2@3441,1875
OUTL: C46.1 U6.8 | length 206.9
  Top Layer w8: U6.8@543,462 543,342.06 C46.1@604.47,280.59
OUTR: C53.1 U6.5 | length 447.5
  Top Layer w8: U6.5@393,462 393,247 441.41,198.59 C53.1@605.47,198.59
PVDD: C40.2 R26.2 U5.17 | length 784
  Bottom Layer w8: R26.2@258.37,1549 C40.2@336.37,1471
  Bottom Layer w12: C40.2@336.47,1471 336.47,1027.53 392,972 U5.17@392,820.33
PVSS: C40.1 R28.1 U5.18 | length 778
  Bottom Layer w8: C40.1@395.53,1471 404.63,1471 R28.1@474.63,1541
  Bottom Layer w12: C40.1@395.53,1471 396,1470.53 396,1012 442,966 U5.18@442,820.33
RAM_NCS: U1.151 U2.7 | length 2631.1
  Top Layer w8: v1@4207.31,1552.69 4239.62,1585 4385,1585 4435.5,1534.5 4953.5,1534.5 5062,1643 v1(5217,1643)
  Bottom Layer w8: U1.151@3172.17,920.04 3574.04,920.04 4100.47,1446.47 4101.09,1446.47 4106.36,1451.74 4106.36,1452.36 v1(4207,1553) ; U2.7@5217,1398.22 v1(5217,1643)
RAM_NOE: U1.146 U2.44 | length 2244.4
  Top Layer w8: v1(3748,821.62) 3797.62,821.62 3863,887 3980,887 4127,740 v1(4369,740)
  Bottom Layer w8: U1.146@3172.17,821.62 3581.21,821.62 3586.09,826.5 3603.91,826.5 3608.79,821.62 v1(3748,821.62) ; v1(4369,740) 4371.5,742.5 4992.5,742.5 5064,671 5064,602 5074,592 5166,592 5177.36,603.36 U2.44@5177.36,642.05
RAM_NWE: U1.147 U2.18 | length 2805.7
  Top Layer w8: v1(4274,1560) 4388.79,1560 4429.79,1519 4959.21,1519 5053.21,1613 5386,1613 v1(5425,1574)
  Bottom Layer w8: U1.147@3172.17,841.3 3173.46,841.3 3175.16,843 3523,843 3927.5,1247.5 3927.5,1248.91 3940.09,1261.5 3941.5,1261.5 3948.5,1268.5 3948.5,1273.91 4148.59,1474 4162,1474 4248,1560 v1(4274,1560) ; v1(5425,1574) 5428.49,1570.51 5428.49,1402.73 U2.18@5433,1398.22
RESET: C26.2 CON2.A8 P2.5 S1.0 U1.31 | length 9709.5
  Top Layer w8: v1(3106,685) 3080,711 3080,889 3134,943 v1(3271,943) ; CON2.A8@3735.51,2410 3735.51,2501.49 3605,2632 3250.48,2632 3180.48,2702 2681.43,2702 2603,2623.57 2603,2197.79 2972.5,1828.29 2972.5,644.56 2800,472.06 2800,269 P2.5@2939,130 2981,88 6298.61,88 S1.0@6454.75,244.13 S1.0@6754.75,244.13 6845.66,244.13 6880,278.47
  Bottom Layer w8: v1(2970,642.06) 2970,627 2985.06,642.06 3060.84,642.06 3078.24,659.45 3078.45,659.45 3105,686 v1(3106,685) ; v1(3271,943) 3573.41,943 3835.55,1205.14 U1.31@3835.55,1485
SCKT: U5.10 U6.2 | length 190
  Top Layer w8: v1@493,559 U6.2@493,657
  Bottom Layer w8: U5.10@493,467 v1@493,559
  other v1: 493,565
SD_DETECT: CON1.10 R6.2 U1.3 | length 1691.9
  Top Layer w8: v1(3284.37,2969.63) 3284.37,2721.78 v1@3289.15,2717 ; v1(3291,1954) 3280,1943 3280,1645.23 3280.5,1645.73 3280.5,1567.5 v1(3300,1548)
  Top Layer w10: R6.2@3217.37,2971 3218.74,2969.63 v1(3284.37,2969.63)
  Bottom Layer w8: U1.3@3284.37,1485 3284.37,1513.48 3300,1529.1 v1(3300,1548) ; v1(3288,2726) 3288,1957 v1(3291,1954)
  Bottom Layer w10: v1(3284.37,2969.63) 3284.37,2984.72 3292,2992.35 ; 3292.65,2993 CON1.10@3292.65,3074.27
SDIO_CK: CON1.5 U1.141 | length 2919
  Top Layer w8: v1(3391,2779) v1(3621.78,3009.78)
  Bottom Layer w8: U1.141@3172.17,723.19 3143.69,723.19 2927,939.88 2927,977.72 2870,1034.72 2870,1037.55 2855.62,1051.93 2852.79,1051.93 2844,1060.72 2844,2082.21 2956,2194.21 2956,2500.21 3234.79,2779 v1(3391,2779) ; v1(3621.78,3009.78) CON1.5@3621.78,3074.27
SDIO_CMD: CON1.2 R1.1 U1.144 | length 3207.4
  Top Layer w8: v1(3499,2753) 3686,2940 3861,2940 v1(3927,3006)
  Top Layer w12: v1(3927,3006) R1.1@3927,3072.63
  Bottom Layer w8: U1.144@3172.17,782.24 3143.69,782.24 2859,1066.93 2859,2076 2975,2192 2975,2498 3230,2753 v1(3499,2753)
  Bottom Layer w12: v1(3927,3006) CON1.2@3927,3074.17
SDIO_D0: CON1.7 R5.1 U1.117 | length 4710.3
  Top Layer w8: v1(3426,3006) 3460,3040 R5.1@3460,3079.63
  Bottom Layer w8: CON1.7@3422.57,3074.27 3422.57,3009.43 v1(3426,3006) ; CON1.7@3426,3074.27 3426,3199 3373,3252 3184,3252 3027,3095 3027,2663 2887,2523 2887,2210.07 2784,2107.07 2784,1035.87 2862,957.87 2862,231 2915,178 2958,178 2975,195 3438,195 3540.28,297.28 U1.117@3540.28,492.88
SDIO_D1: CON1.8 R4.1 U1.118 | length 4004.1
  Top Layer w8: v1(3353,3005) R4.1@3353,3079.63
  Bottom Layer w8: CON1.8@3355.64,3074.27 3353,3071.63 v1(3353,3005) 3353,2965.54 2904,2516.54 2904,2205.85 2799,2100.85 2799,1042.08 2877,964.08 2877,326 2920,283 2954,283 3024,213 3432,213 3520.59,301.59 U1.118@3520.59,492.88
SDIO_D2: CON1.9 R3.1 U1.139 | length 3587.9
  Top Layer w12: v1(4135.63,3005.37) R3.1@4135.63,3075
  Bottom Layer w8: U1.139@3172.17,683.82 3143.69,683.82 2892,935.51 2892,970.29 2814,1048.3 2814,2094.64 2921,2201.64 2921,2508 3259,2846 3976.26,2846 v1(4135.63,3005.37)
  Bottom Layer w12: v1@4130.83,3010.17 CON1.9@4130.83,3074.27
SDIO_D3: CON1.1 R2.1 U1.140 | length 3433
  Top Layer w8: v1(3629,2814) 3833,2814 v1(4028,3009)
  Top Layer w12: v1(4028,3009) R2.1@4028,3072.63
  Bottom Layer w8: U1.140@3172.17,703.5 3143.69,703.5 2908,939.19 2908,975.51 2855,1028.51 2855,1031.34 2849.4,1036.93 2846.57,1036.93 2829,1054.51 2829,2088.43 2940,2199.43 2940,2505.43 3248.57,2814 v1(3629,2814)
  Bottom Layer w12: v1@4028.87,3009.87 CON1.1@4028.87,3074.27
SDO: U5.9 U6.1 | length 191.4
  Top Layer w8: v1@542,560 542,656 U6.1@543,657
  Bottom Layer w8: U5.9@542,466 v1@542,560
  other v1: 542,565
SHIFT_CENTER: U3.10 U4.9 | length 514.4
  Top Layer w8: U3.10@5680.47,2996.46 v1@5748.54,2996.46 ; v1(6109,2972) 6189.61,2972 6190.61,2971 U4.9@6190.47,2970.87
  Bottom Layer w8: v1(5754,2994) 5872.09,2994 5894.09,2972 v1(6109,2972)
SPI2_INPUT_MISO: pad.4 U1.34 U3.9 | length 2562.6
  Top Layer w8: v1(3942,1745) 3956,1731 3956,1593 3950,1587 v1(3956,1587) ; v1(5392,2766) 5504,2766 5680.47,2942.47 U3.9@5680.47,2970.87
  Bottom Layer w8: U1.34@3894.61,1485 3894.61,1525.61 v1(3956,1587) ; v1(3942,1745) 4078,1745 5099,2766 v1(5392,2766)
SPI2_INPUT_SCK: pad.5 U1.93 U3.2 U4.2 | length 5966.9
  Top Layer w8: v1(4014,435) 4043,406 4226,406 4279.5,459.5 4415.5,459.5 4462,413 5986,413 6053,480 6053,1107 5477,1683 5477,2445 5212,2710 5212,2974.4 5353,3115.4 v1(5353,3122) ; v1@5353,3124.41 U3.2@5460,3124.41 U3.2@5459.41,3125 ; v1(5888.73,3115.72) 5897.41,3124.41 U4.2@5970,3124.41
  Bottom Layer w8: U1.93@4012.72,492.88 4012.72,436.28 v1(4014,435) ; 5367.64,3125 5524,3125 5551,3098 5704,3098 5730.41,3124.41 5880.04,3124.41 v1(5888.73,3115.72)
SPI3_MUSIC_MOSI: pad.2@1859,1150 U1.150 U5.5 | length 3000.6
  Top Layer w8: v1(1168,1051) 1274.21,1051 1373.21,1150 1903,1150 2010,1043 v1(2335,1043) ; v1(2743,1060) 2761,1078 v1(2887,1078)
  Bottom Layer w8: U5.5@742,466 742,513 779,550 779.43,550 1012,782.57 1012,1004 1059,1051 v1(1168,1051) ; v1(2335,1043) 2346,1054 v1@2743,1054 ; v1(2887,1078) 2911,1078 3088.65,900.35 U1.150@3172.17,900.35
SPI3_MUSIC_SCK: pad.3@1770,1202 U1.161 U5.6 | length 3021.8
  Top Layer w8: v1(1100,1094) 1296,1094 1405,1203 1871.21,1203 1984.21,1090 v1(2336,1090) ; v1(2752,1117) 2753,1118 v1(2892,1118)
  Bottom Layer w8: U5.6@692,466 692,489 990,787 990,1067 1017,1094 v1(1100,1094) ; v1(2336,1090) 2725,1090 v1(2752,1117) ; v1(2892,1118) 2893.11,1116.89 U1.161@3172.17,1116.89
SPI5_LCD_MOSI: CON2.A11 U1.27 | length 1016.3
  Top Layer w8: CON2.A11@3676.46,2410 3676.46,2329.54 v1(3681,2325) ; v1(3787,2130) 3787,1728 3821,1694 v1(3821,1588)
  Bottom Layer w8: v1(3681,2325) 3681,2227.77 3778.77,2130 v1(3787,2130) ; U1.27@3756.81,1485 3756.81,1521.81 3821,1586 v1(3821,1588)
SPI5_LCD_SCK: CON2.A10 U1.25 | length 998.1
  Top Layer w8: CON2.A10@3696.14,2410 3696.14,2343.86 3723,2317 v1(3723,2278) ; v1(3723,2219) 3664,2160 3664,1661 v1(3736,1589)
  Bottom Layer w8: U1.25@3717.44,1485 3717.44,1570.44 v1(3736,1589) ; v1(3723,2219) v1(3723,2278)
"STATUS_OUT 0": LED0.A U1.7 | length 1278.7
  Top Layer w8: LED0.A@2799,962.9 2709,1052.9 2709,1334 v1(2895,1520) ; v1(3304,1614) 3337,1581 v1(3338,1581)
  Bottom Layer w8: v1(2895,1520) 2992.5,1617.5 3300.5,1617.5 v1(3304,1614) ; v1(3338,1581) 3342,1581 3363.11,1559.89 U1.7@3363.11,1485
"STATUS_OUT 1": LED1.A U1.8 | length 1424.4
  Top Layer w8: LED1.A@2534,967.9 2534,1217 2888,1571 v1(2889,1571) ; v1(3314,1654) 3314,1644 3348,1610 3362,1610 v1(3362,1614)
  Bottom Layer w8: v1(2889,1571) 2889,1572 2971,1654 v1(3314,1654) ; v1(3362,1614) 3362,1596 3382.79,1575.21 U1.8@3382.79,1485
SWCLK: P2.2 U1.137 | length 362.4
  Bottom Layer w8: P2.2@2939,430 3023,514 3023,583 3084.45,644.45 U1.137@3172.17,644.45
SWDIO: P2.4 U1.124 | length 648.2
  Top Layer w8: P2.4@2939,230 3045,336 3370.96,336 3401.89,366.93
  Top Layer w10: 3403.48,366.52 3405,368.04 v1(3405,423)
  Bottom Layer w10: U1.124@3403.48,493.88 3405,492.36 v1(3405,423)
TOUCH_NINT: CON3.5 U1.45 | length 1503.2
  Top Layer w8: CON3.5@4417.48,2642.28 4417.48,2350.52 4489,2279 v1(4489,1558)
  Bottom Layer w8: U1.45@4164.29,1412.17 4202.17,1412.17 4353,1563 4484,1563 v1(4489,1558)
U8A_B: C45.2 D1.A R29.2 U8.2 | length 605.3
  Top Layer w8: C45.2@1368.53,731 1429,731 1489.12,791.12 D1.A@1566,791.12 ; R29.2@1569,904.63 1569,794.12 D1.A@1566,791.12 ; U8.2@1778,656.41 1777.59,656 1718,656 1582.88,791.12 D1.A@1566,791.12
U8B_B: C50.2 D2.K R33.1 U8.5 | length 1223.6
  Top Layer w8: C50.2@1368.53,647 1408,647 1510,545 1510,379.37 R33.1@1566,323.37 ; D2.K@1566,483.88 R33.1@1566,323.37 ; U8.5@1852.8,656.41 1892.59,656.41 1896,653 1896,448 1800,352 1602.63,352 R33.1@1570,319.37 R33.1@1566,323.37
U9A_B: C52.2 D3.A R36.2 U9.2 | length 1469.5
  Top Layer w8: C52.2@1365.53,426 v1(1469,529.47)
  Bottom Layer w8: v1(1469,529.47) 1469,851 1516.63,898.63 R36.2@1569,898.63 D3.A@1569,803.12 1897.88,803.12 1986.5,714.5 1986.5,543.5 1912.41,469.41 U9.2@1856,469.41
U9B_B: C56.2 D4.K R40.1 U9.5 | length 599.8
  Top Layer w8: C56.2@1365.53,342 1431,342 v1(1445,328)
  Bottom Layer w8: v1(1445,328) 1560.37,328 1569,319.37 D4.K@1569,486.88 1677.12,486.88 1694.59,469.41 U9.5@1781.2,469.41
UART1_DEBUG_RX: P_Debug.2 U1.121 | length 7245.9
  Top Layer w8: v1(3480,309) 3638,309 3844,103 6236,103 6874,741 6874,3950 P_Debug.2@6802,4022
  Bottom Layer w8: U1.121@3461.53,492.88 3461.53,327.47 v1(3480,309)
UART1_DEBUG_TX: P_Debug.3 U1.120 | length 7215.1
  Top Layer w8: v1(3489,357) 3611.21,357 3850.21,118 6216.79,118 6764.84,666.06 6764.84,1465.37 6761.47,1468.74 6761.47,4081.47 P_Debug.3@6802,4122
  Bottom Layer w8: U1.120@3481.22,492.88 3481.22,364.78 v1(3489,357)
UART6_MULTI_RX: P_Multi.2 U1.116 | length 7500.8
  Bottom Layer w8: U1.116@3559.96,492.88 3559.96,242.04 3712,90 6486,90 6648,252 6648,496.79 6830,678.79 6830,3625 6433,4022 P_Multi.2@6411,4022
UART6_MULTI_TX: P_Multi.3 U1.115 | length 7602.1
  Bottom Layer w8: U1.115@3579.64,492.88 3579.64,245.36 3712,113 6481,113 6630,262 6630,500 6814,684 6814,3462 6507,3769 6439,3769 6357,3851 6357,4068 P_Multi.3@6411,4122
VCAP1: C14.1 U1.81 | length 138.7
  Top Layer w10: C14.1@4164.53,703 4208,703 4219,714 v1(4230,714)
  Bottom Layer w10: U1.81@4165.29,704.51 4209.51,704.51 4219,714 v1(4230,714)
VCAP2: C15.1 U1.125 | length 247.7
  Top Layer w15: v1(3433,391) C15.1@3433,484.47
  Bottom Layer w12: U1.125@3382.79,492.88 3382.79,438.79 3373,429 3373,411 3393,391
  Bottom Layer w15: 3393,391 v1(3433,391)
XTI: C39.2 R25.1 U5.21 Y3.2 | length 692.8
  Top Layer w8: R25.1@586.37,1335 655.06,1266.31 Y3.2@655.06,1065
  Bottom Layer w8: U5.21@592,820.33 592,901 655.06,964.06 Y3.2@655.06,1065 ; Y3.2@658,1067.94 C39.2@658,1191.47
XTO: C34.2 R25.2 U5.20 Y3.1 | length 689.5
  Top Layer w8: Y3.1@462.94,1065 462.94,1290.31 R25.2@507.63,1335
  Bottom Layer w8: Y3.1@460,1067.94 C34.2@460,1191.47 ; Y3.1@462.94,1065 462.94,980.06 542,901 U5.20@542,820.33
pads on no net: CON1.0 CON2.A5 CON2.A6 CON2.A7 CON2.A39 CON2.A40 CON2.A43 CON2.A44 CON2.A45 CON2.A46 CON2.A47 CON2.A48 CON2.A49 CON2.A50 CON2.A51 U1.1 U1.4 U1.5 U1.13 U1.24 U1.32 U1.33 U1.35 U1.40 U1.41 U1.42 U1.43 U1.44 U1.46 U1.53 U1.54 U1.55 U1.58 U1.59 U1.83 U1.84 U1.85 U1.86 U1.87 U1.89 U1.92 U1.94 U1.95 U1.123 U1.128 U1.130 U1.134 U1.138 U1.145 U1.152 U1.153 U1.156 U1.157 U1.160 U1.162 U1.163 U1.167 U1.168 U1.173 U1.174 U2.6 U2.19 U2.31 U3.7 U4.7

## Polygon pours and split planes (outlines as drawn)
3V3P on Top Layer "3V3_Decouple" (solid, remove dead copper, pour order 12): 400,3540 400,3180 580,3180 580,3540
5V0P on Top Layer "5V0_Decouple" (solid, remove dead copper, pour order 10): 760,3540 760,3180 900,3180 900,3540
AGND on GND (split plane): 2264.91,20.1 20.1,20.1 20.1,994.91 2264.91,994.91
GND on GND (split plane): 6922.9,4273.9 6922.9,20.1 2285.09,20.1 2285.09,1005 2284.74,1007.61 2283.73,1010.04 2282.13,1012.13 2280.04,1013.74 2277.61,1014.74 2275,1015.09 20.1,1015.09 20.1,3140 20.1,4273.91
3V3P on 3V3P (split plane): 6922.9,4273.9 6922.9,20.1 20.1,20.1 20.1,3140 20.1,4273.91

## Keep-outs
Keep-Out Layer:
  lines w7.87: 0,0 0,3140 0,4297 1847,4297 5757,4297 6943,4297 6943,3480 6943,0

## Other copper
GND (plane layer: these items are gaps in the copper):
  rectangle: 0,0 0,3140
  lines w20: 5,1005 75,1005 2275,1005 2275,10
  lines w30: -5,1015 5,1005

## Silkscreen, mask and mechanical layers (free items; w line width, h text height)
Top Overlay:
  text "Riley Duffy" at 86,4129 h80
  text "Super GameBro Rev A1" at 4667,4118 h80
  text "Brandon Pollack" at 86,3969 h80
  text "VCC" at 5976,3612 h30
  text "GND" at 5707,3609 h30